# Altium PCB PCB_V1.0.PcbDoc
Units mm, origin at the board's own origin, x right, y up, seen from the top; angles counter-clockwise.
Board outline 35.05 x 16.38 mm, 2 copper layers (Top Layer, Bottom Layer); 15 components, 23 nets, 64 pads, 20 vias.
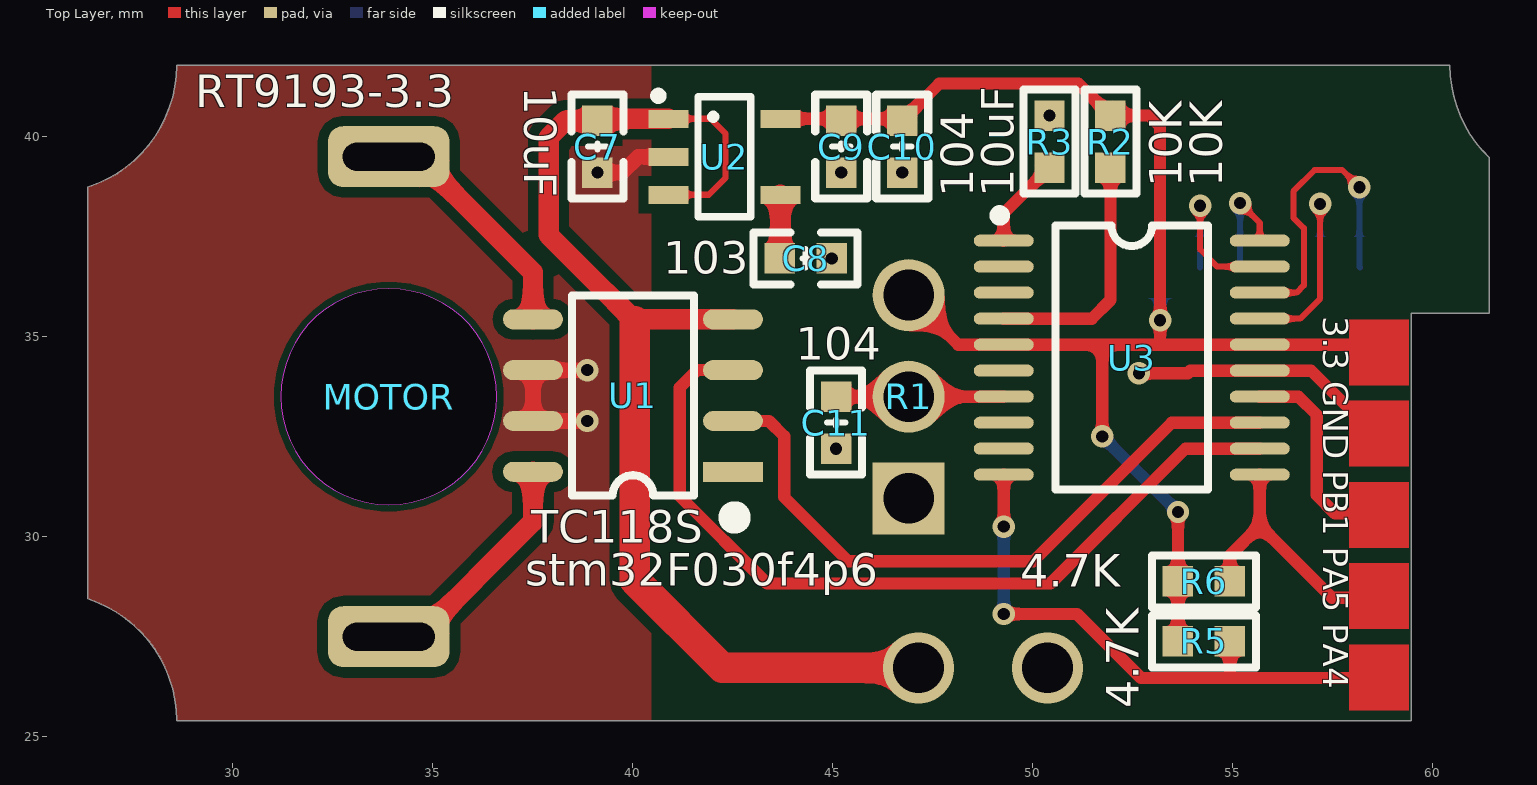
[diagram p0: Top Layer view]
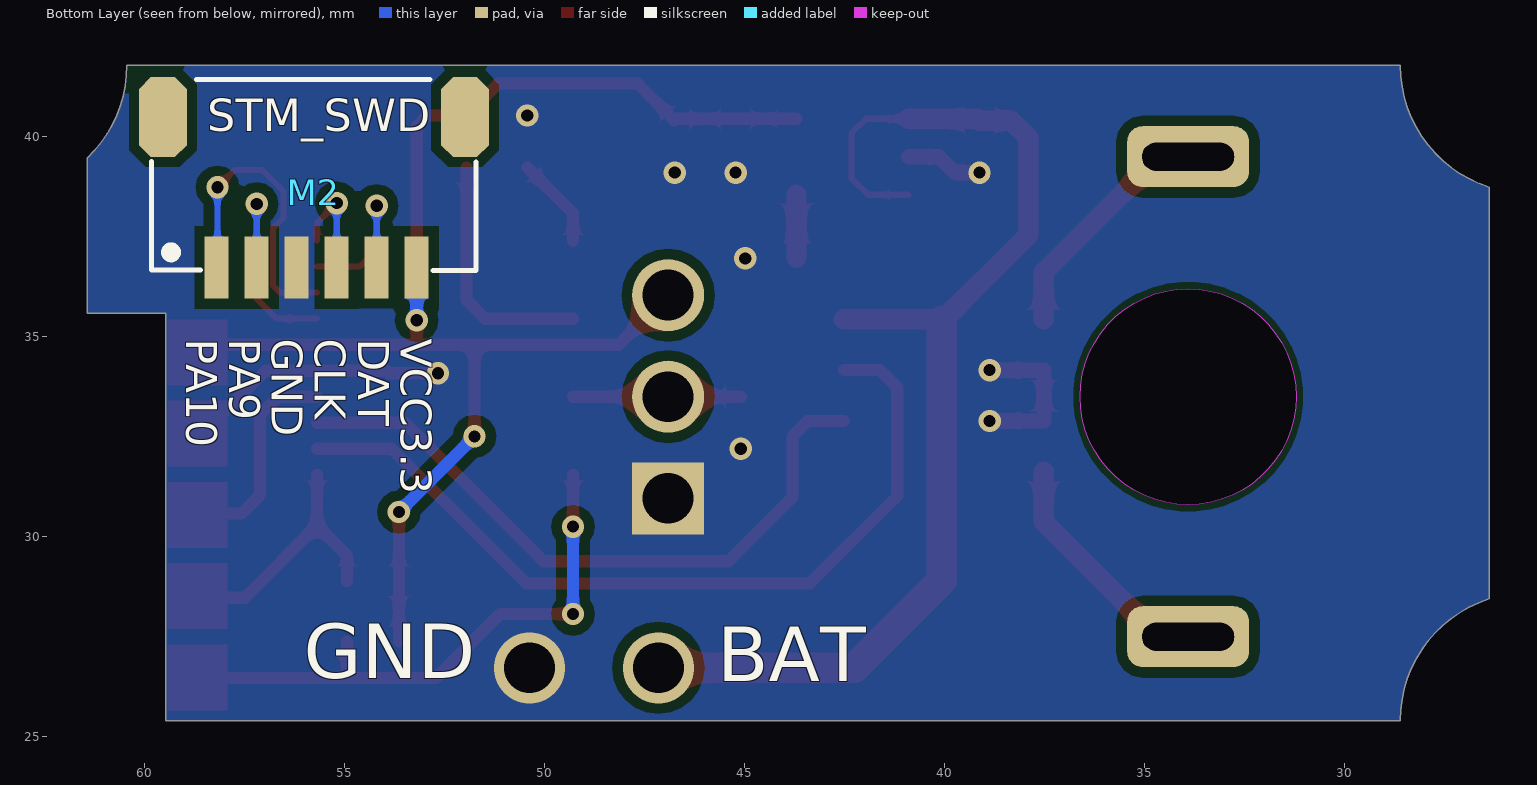
[diagram p1: Bottom Layer view, seen from below]
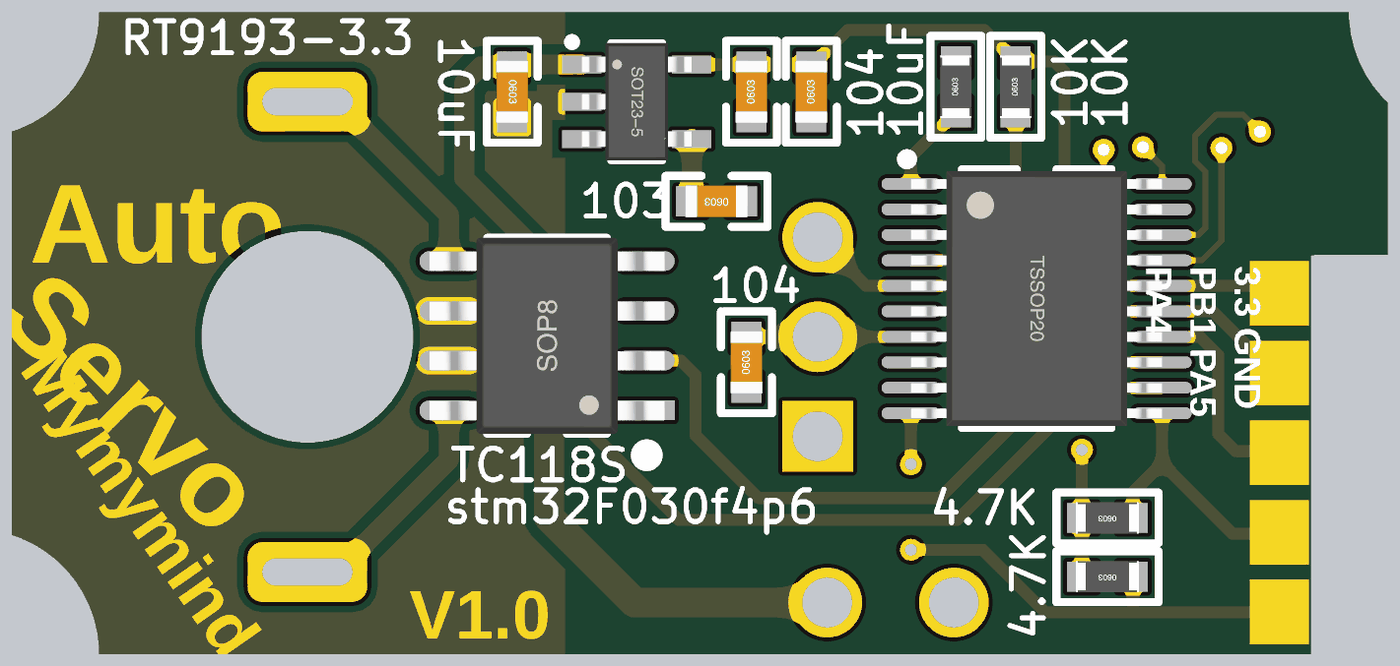
[diagram p2: 3D render of the assembled board from above, using the file's embedded part models]

## Layer stack, top to bottom
Top Solder: solder mask 0.0102, Solder Resist, Dk 3.5
Top Layer: signal copper 0.0356
Dielectric 1: dielectric 0.32, FR-4, Dk 4.8
Bottom Layer: signal copper 0.0356
Bottom Solder: solder mask 0.0102, Solder Resist, Dk 3.5

## Board outline
28.596,25.4 ccw(c25.4,25.4) 26.378,28.443 26.371,28.443 26.371,38.738 ccw(c25.4,41.783) 28.596,41.783 60.431,41.783 ccw(c63.627,41.783) 61.418,39.473 61.418,35.585 59.461,35.585 59.461,25.4
cut-out: 31.2,33.5 ccw(c33.9,33.5) 33.9,30.8 ccw(c33.9,33.5) 36.6,33.5 ccw(c33.9,33.5) 33.9,36.2 ccw(c33.9,33.5)

## Design rules (kind name [scope] priority, off if disabled: settings)
Clearance [All] p1: gap=0.152 except(0.254: Arc-Poly Track-Poly SMDPad-Poly THPad-Poly Via-Poly Fill-Poly Poly-Poly)
PlaneConnect [All] p1: planeconnectstyle=Direct reliefexpansion=0.508 reliefentries=4 reliefconductorwidth=0.254 reliefairgap=0.254
PolygonConnect [All] p1: connectstyle=Direct reliefconductorwidth=0.254 reliefentries=4 polygonreliefangle="90 Angle" airgapwidth=0.254
RoutingVias [All] p1: holewidth=0.305 width=0.559 viastyle="Through Hole" minholewidth=0.305 minwidth=0.559 maxholewidth=5.08 maxwidth=12.7
SolderMaskExpansion [All] p1: expansion=0.102
Width [All] p1: maxlimit=5.08 minlimit=0.152 preferedwidth=0.254 minimp=50.000000 maximp=50.000000 favimp=50.000000
29 further rules are at their usual default settings.

## Components (designator, comment, footprint, x,y, rotation, side; value= is the part's Value field where it differs from the comment)
C7 "10uF" "C 0603_L" 39.116,39.751 r270 top
C8 "103" "C 0603_L" 44.323,36.957 r180 top
C9 "104" "C 0603_L" 45.212,39.751 r90 top
C10 "10uF" "C 0603_L" 46.736,39.751 r90 top
C11 "104" "C 0603_L" 45.085,32.85 r90 top
M2 "STM_SWD" SH1.0_6P 55.753,38.608 r180 bottom
MOTOR "Motor-SMD" MOTOR-SMD 36.138,28.85 r270 top locked
R1 "10K" 3296W 46.9,33.5 r90 top locked
R2 "10K" "R 0603_L" 51.943,39.878 r90 top
R3 "10K" "R 0603_L" 50.419,39.878 r90 top
R5 "4.7K" "R 0603_L" 54.28,27.381 r180 top
R6 "4.7K" "R 0603_L" 54.28,28.88 r180 top
U1 "TC118S" SOP8_L 40.005,33.528 r180 top
U2 "RT9193-3.3" SOT23-5L 42.291,39.497 r270 top
U3 "stm32F030f4p6" TSSOP20_N 52.476,34.475 r0 top

## Footprints (in the part's own frame and the unit in brackets; to place one, negate y for a bottom-side part, rotate by r counter-clockwise, add the part's x,y. Pads: shape width x height; smd on the part's side, far side on the other; paste and mask are expansions set on the pad)
3296W [mm] "Precise Multi-Winding Adjustable Resistor"
  rect 1.8x1.8 hole 1.27: 1(-2.54,0)
  round 1.8 hole 1.27: 2(0,0) 3(2.54,0)
"C 0603_L" [mil] "无极性贴片电容"
  rect 30x30 smd: 1(-25.59,0) 2(25.59,0)
  silkscreen extent -51,-26 51,26, body extent -31,-16 31,16, height 32
MOTOR-SMD [mm]
  rrect50% 1.524x3.048 hole 0.7 slot 2.3 at 90 deg: 1(-10.65,-2.238) 2(1.35,-2.238)
"R 0603_L" [mil] "1/10W贴片电阻"
  rect 30x30 smd: 1(-25.59,0) 2(25.59,0)
  silkscreen extent -51,-26 51,26, body extent -31,-16 32,16, height 16
SH1.0_6P [mm]
  rect 0.6x1.55 smd: 1(-2.432,-1.88) 2(-1.432,-1.88) 3(-0.432,-1.88) 4(0.568,-1.88) 5(1.568,-1.88) 6(2.568,-1.88)
  oct 1.2x2 smd: A(-3.778,1.88) B(3.778,1.88)
  silkscreen extent -4.06,-1.96 4.05,2.82, body extent -3.93,-2.51 4.07,2.44, height 2.9
SOP8_L [mm] "5*6*1.8mm（长宽高）"
  rect 1.5x0.5 smd: 1(-2.5,1.905)
  oval 1.5x0.5 smd: 2(-2.5,0.635) 3(-2.5,-0.635) 4(-2.5,-1.905) 5(2.5,-1.905) 6(2.5,-0.635) 7(2.5,0.635) 8(2.5,1.905)
  silkscreen extent -2.69,-2.5 1.52,3.2, body extent -3,-2.5 3,2.5, height 1.9
SOT23-5L [mm] "3x1.6x1.1mm(长宽高)"
  rect 0.45x1 smd: 1(-0.95,-1.4) 2(0,-1.4) 3(0.95,-1.4) 4(0.95,1.4) 5(-0.95,1.4)
  silkscreen extent -1.6,-1.73 1.5,0.66, body extent -1.5,-1.4 1.5,1.4, height 1.15
TSSOP20_N [mm] "6.5*6.4*1（长宽高）"
  oval 1.5x0.3 smd: 1(-3.2,2.925) 2(-3.2,2.275) 3(-3.2,1.625) 4(-3.2,0.975) 5(-3.2,0.325) 6(-3.2,-0.325) 7(-3.2,-0.975) 8(-3.2,-1.625) 9(-3.2,-2.275) 10(-3.2,-2.925) 11(3.2,-2.925) 12(3.2,-2.275) 13(3.2,-1.625) 14(3.2,-0.975) 15(3.2,-0.325) 16(3.2,0.325) 17(3.2,0.975) 18(3.2,1.625) 19(3.2,2.275) 20(3.2,2.925)
  silkscreen extent -3.43,-3.3 1.91,3.69, body extent -3.2,-3.25 3.2,3.25, height 1.03

## Part data
C7 C8 C9 C10 C11: library part C
M2: library part HEAD6
MOTOR: "贴片震动电机"
R1: library part R_ADJ, "电位器/可调电阻"
R2 R3 R5 R6: library part R
U1: library part SN74LVC2T45DCUR, "双位双电源总线收发器"
U2: library part CAT6219-330TD, "3.3V 500mA LDO"
U3: library part stm32f030

## Via types
v1: diameter 0.559, hole 0.305, Top Layer to Bottom Layer, 18 vias
v2: diameter 1.778, hole 1.27, Top Layer to Bottom Layer, 2 vias

## Nets (pads, with @x,y where several pads share a name; then routed paths per layer and width w, separated by ;. In a path a pad name is that pad's centre, name@x,y a point inside that pad or via, vN(x,y) a via of type N, cw(c..) or ccw(c..) an arc to the next point about the centre after c; other vN are vias at no path point)
BOOT0: R3.1 U3.1 | length 2.3
  Top Layer w0.305: U3.1 49.276,38.085 R3.1
GND: C7.2 C8.1 C9.1 C10.1 C11.1 M2.3 R1.1 R3.2 U1.6 U1.7 U2.2 U3.15 | length 11.9
  Top Layer w0.305: v1(52.654,34.087) 53.873,34.087 53.937,34.15 U3.15 56.96,34.15 57.988,33.122 58.217,33.122
  Top Layer w0.381: v1(38.862,32.893) U1.7 U1.6 v1(38.862,34.163) ; v1(39.116,39.101) 39.736,39.101 40.132,39.497 U2.2
  other v1: 45.085,32.2 44.973,36.957 45.212,39.101 46.736,39.101 50.419,40.528
  other v2: 50.368,26.721
JTCK: M2.4 U3.20 | length 2.8
  Top Layer w0.152: v1(55.185,38.338) 55.676,37.847 U3.20
  Bottom Layer w0.152: M2.4 v1(55.185,38.338)
JTMS: M2.5 U3.19 | length 4.3
  Top Layer w0.152: v1(54.185,38.271) 54.185,37.179 54.614,36.75 U3.19
  Bottom Layer w0.152: M2.5 v1(54.185,38.271)
NetC8_2: C8.2 U2.4 | length 1.6
  Top Layer w0.381: C8.2 C8.2@43.691,36.975
  Top Layer w0.508: C8.2@43.691,36.975 U2.4
NetMOTOR_1: MOTOR.1 U1.5 | length 6
  Top Layer w0.508: MOTOR.1 34.617,39.5 37.505,36.612 U1.5
NetMOTOR_2: MOTOR.2 U1.8 | length 6
  Top Layer w0.508: MOTOR.2 34.637,27.5 37.505,30.368 U1.8
PA0: U3.6
PA1: C11.2 R1.2 U3.7 | length 4.2
  Top Layer w0.305: C11.2 R1.2 U3.7
PA2: U3.8
PA3: U3.9
PA4: R5.1 U3.10 | length 14.4
  Top Layer w0.305: v1(49.276,28.067) 51.105,28.067 52.705,26.467 54.915,26.467 ; v1(49.276,30.251) U3.10 ; R5.1 54.93,26.482 54.915,26.467 ; 58.623,26.467 54.915,26.467
  Bottom Layer w0.305: v1(49.276,28.067) v1(49.276,30.251)
PA5: R6.1 U3.11 | length 6.6
  Top Layer w0.305: R6.1 54.93,29.531 55.676,30.278 ; U3.11 55.676,30.278 ; 58.598,28.473 57.48,28.473 55.676,30.278
PA6: U1.3 U3.12 | length 21
  Top Layer w0.305: U1.3 41.605,34.163 41.173,33.731 41.173,31.013 43.358,28.829 50.444,28.829 53.815,32.2 U3.12
PA7: U1.2 U3.13 | length 16.9
  Top Layer w0.305: U1.2 43.409,32.893 43.79,32.512 43.79,30.988 45.39,29.388 50.013,29.388 53.475,32.85 U3.13
PA9: M2.2 U3.17 | length 5.7
  Top Layer w0.152: U3.17 56.684,35.45 57.185,35.95 v1(57.185,38.319)
  Bottom Layer w0.152: M2.2 v1(57.185,38.319)
PA10: M2.1 U3.18 | length 7.7
  Top Layer w0.152: U3.18 56.598,36.1 56.778,36.28 56.778,37.71 56.515,37.973 56.515,38.633 57.048,39.167 57.734,39.167 v1(58.166,38.735)
  Bottom Layer w0.152: v1(58.166,38.735) 58.166,36.747 M2.1
PB1: U3.14 | length 5.2
  Top Layer w0.305: U3.14 56.645,33.5 57.099,33.045 57.099,31.039 57.556,30.582 58.496,30.582
PF0: U3.2
PF1: U3.3
RESET: R2.1 U3.4 | length 6.2
  Top Layer w0.305: U3.4 51.477,35.45 51.943,35.916 R2.1
VCC: C7.1 U1.4 U2.1 U2.3 | length 29.9
  Top Layer w0.152: U2.3 41.9,38.547 42.316,38.964 42.316,40.081 41.951,40.447 U2.1
  Top Layer w0.381: C7.1 C7.1@39.162,40.447 ; 40.056,35.382 40.107,35.433
  Top Layer w0.508: C7.1 38.318,40.401 37.897,39.98 37.897,37.541 40.056,35.382 ; C7.1@39.162,40.447 U2.1 ; 40.107,35.433 U1.4
  Top Layer w0.762: 40.056,35.382 40.056,28.905 42.24,26.721 v2(47.142,26.721)
VCC3.3: C9.2 C10.2 M2.6 R1.3 R2.2 R5.2 R6.2 U2.5 U3.5 U3.16 | length 37.4
  Top Layer w0.305: U2.5 46.69,40.447 C10.2 47.661,41.326 51.145,41.326 R2.2 52.919,40.528 53.185,40.262 v1(53.185,35.411) 53.185,34.803 53.188,34.8 ; R1.3 48.14,34.8 U3.5 51.74,34.8 ; v1(51.74,32.508) 51.74,34.8 ; R5.2 R6.2 v1(53.63,30.617) ; 58.469,34.8 U3.16 53.188,34.8 ; 51.74,34.8 53.188,34.8
  Bottom Layer w0.305: v1(51.74,32.508) v1(53.63,30.617) ; v1(53.185,35.411) M2.6
pads on no net: M2.A M2.B U1.1

## Polygon pours and split planes (outlines as drawn)
GND on Bottom Layer "AutoNaming" (solid, remove dead copper, pour order 0): 26.365,28.447 cw(c25.4,25.4) 28.596,25.4 59.461,25.4 59.461,35.585 61.416,35.585 61.419,39.472 cw(c63.627,41.783) 60.431,41.783 28.596,41.783 cw(c25.4,41.783) 26.365,38.736
GND on Top Layer "AutoNaming" (solid, remove dead copper, pour order 1): 26.365,28.447 cw(c25.4,25.4) 28.596,25.4 40.462,25.4 40.462,41.783 28.596,41.783 cw(c25.4,41.783) 26.365,38.736

## Other copper
Top Layer:
  region net GND: 59.411,31.75 59.411,33.401 57.912,33.401 57.912,31.75
  region net PB1: 59.411,29.718 59.411,31.369 57.912,31.369 57.912,29.718
  region net PA5: 59.411,27.686 59.411,29.337 57.912,29.337 57.912,27.686
  region net VCC3.3: 59.411,33.782 59.411,35.433 57.912,35.433 57.912,33.782
  region net PA4: 59.411,25.654 59.411,27.305 57.912,27.305 57.912,25.654

## Silkscreen, mask and mechanical layers (free items; w line width, h text height)
Top Overlay:
  text "3.3 GND PB1 PA5 PA4" at 57.048,35.509 h1.07 r270
Bottom Overlay:
  text "VCC3.3" at 53.848,34.95 h1.32 r90
  text "DAT" at 54.906,34.95 h1.32 r90
  text "CLK" at 55.996,34.95 h1.32 r90
  text "GND" at 57.07,34.95 h1.32 r90
  text "PA9" at 58.133,34.95 h1.32 r90
  text "PA10" at 59.207,34.95 h1.32 r90
  text "GND" at 56.007,26.01 h2.34
  text "BAT" at 45.669,25.933 h2.34
Top Solder:
  rectangle: 57.912,33.782 59.411,35.433
  rectangle: 57.912,31.75 59.411,33.401
  rectangle: 57.912,29.718 59.411,31.369
  rectangle: 57.912,27.686 59.411,29.337
  rectangle: 57.912,25.654 59.411,27.305
  text "Auto" at 26.619,36.297 h3.25
  text "Servo" at 26.416,34.798 h3.25 r315
  text "Mymymind" at 26.518,32.969 h1.98 r305
  text "V1.0" at 36.297,25.908 h1.98
Mechanical 1:
  circle w0.254: c33.9,33.5 r2.7
  lines w0.127: 26.371,28.443 26.371,38.738 ccw(c25.4,41.783) 28.596,41.783 60.431,41.783 ccw(c63.627,41.783) 61.418,39.473 61.418,35.585 59.461,35.585 59.461,25.4 28.596,25.4 ccw(c25.4,25.4) 26.378,28.443

## Dimensions
33.9,39.5 to 61.418,39.473 on Mechanical 1
26.371,38.738 to 61.418,39.473 on Mechanical 1
28.596,25.4 to 28.596,41.783 on Mechanical 1